# Altium PCB FAT52.PCBDOC
Units mm, origin at the board's own origin, x right, y up, seen from the top; angles counter-clockwise.
Board outline 117.3 x 188.7 mm, 2 copper layers (Top Layer, Bottom Layer); 26 components, 107 nets, 137 pads, 60 vias.
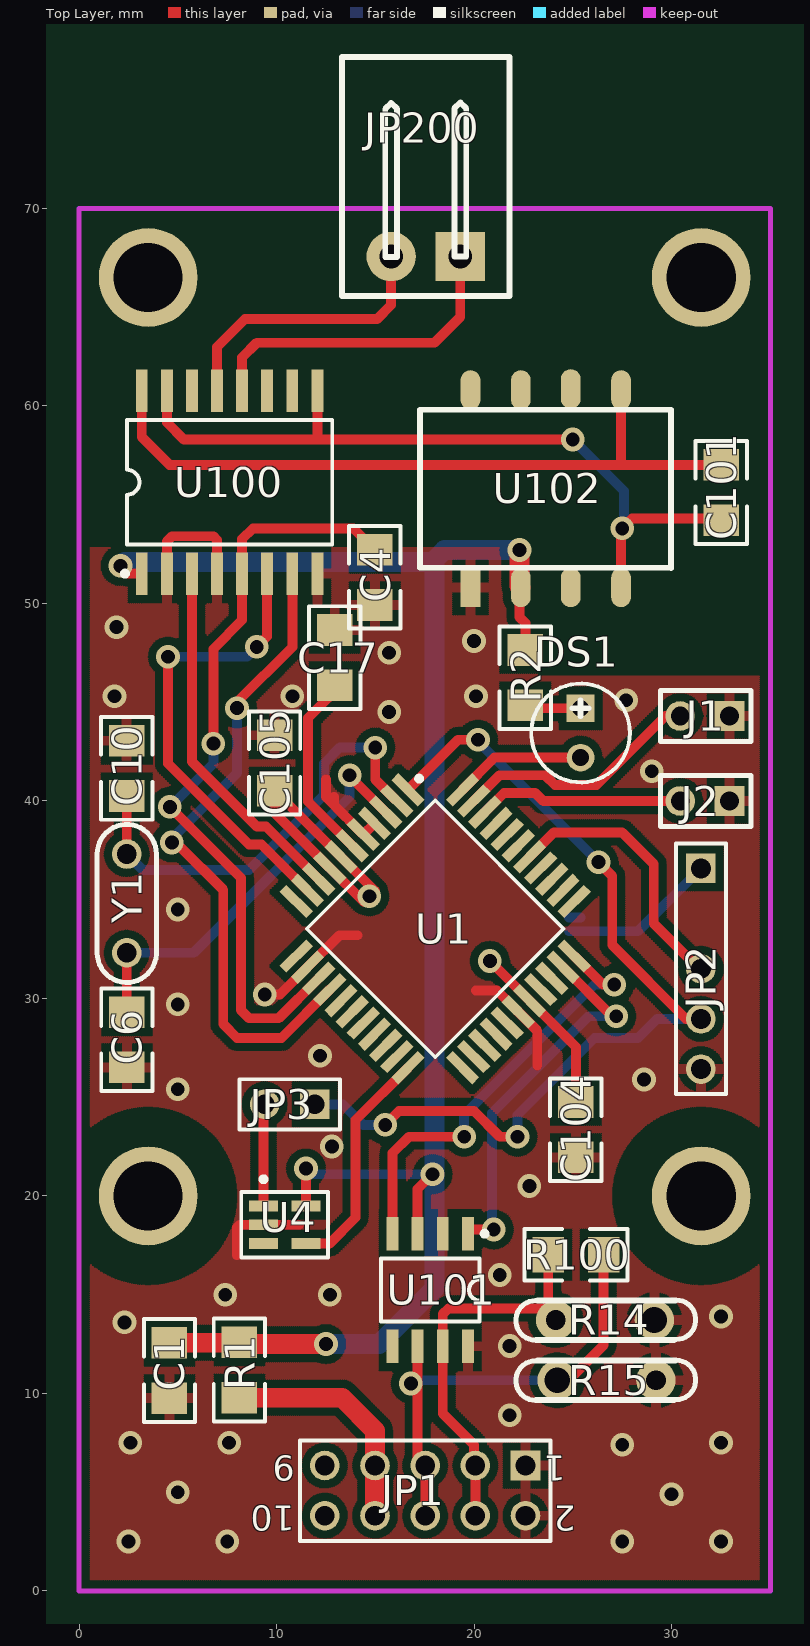
[diagram p0: Top Layer view]
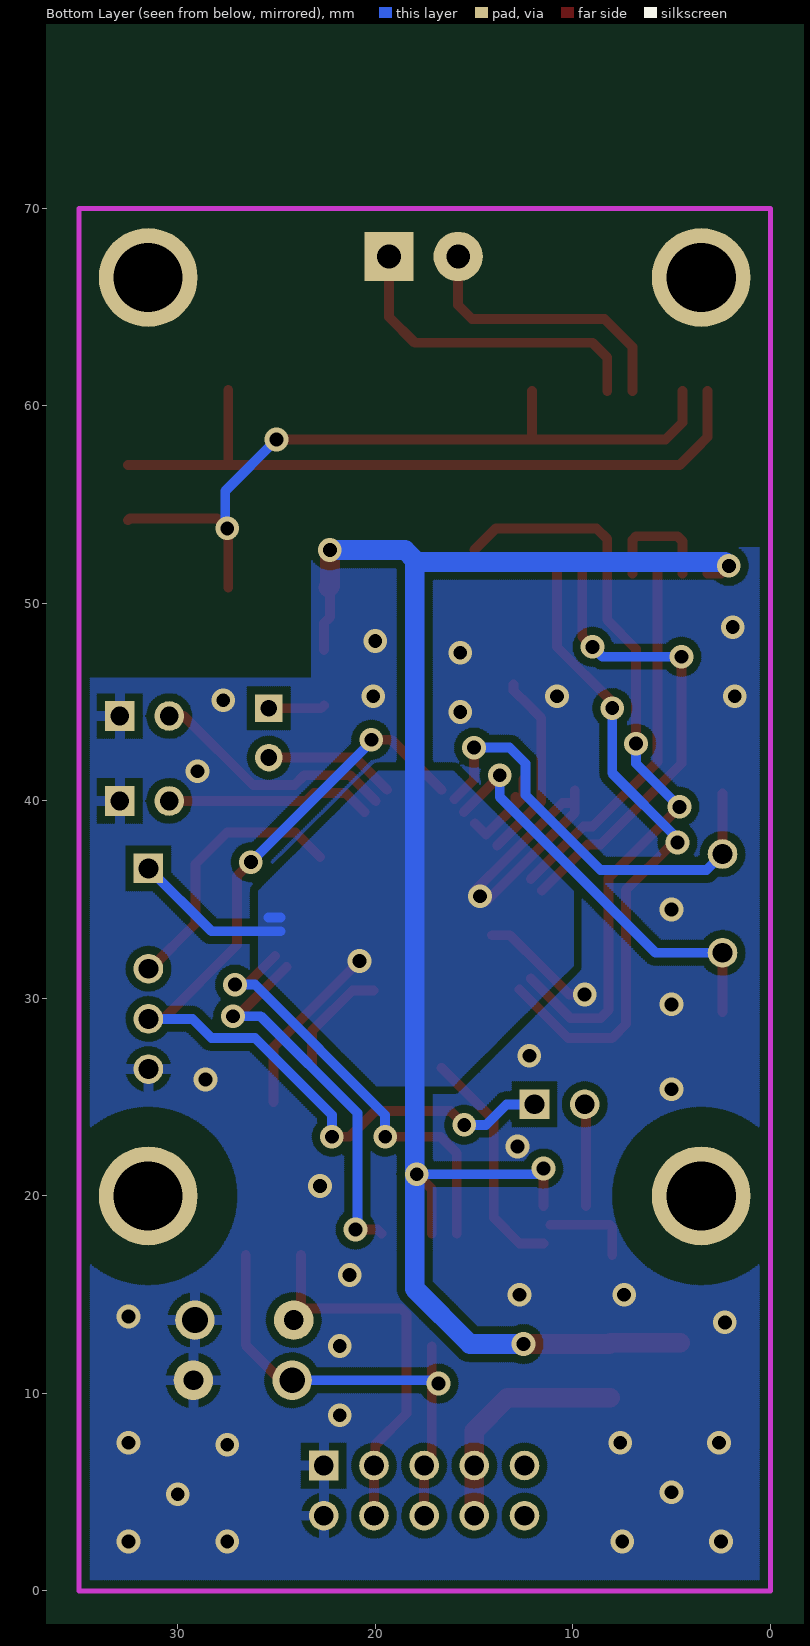
[diagram p1: Bottom Layer view, seen from below]

## Layer stack, top to bottom
Top Layer: signal copper 0.0356
Dielectric: dielectric 0.32, FR-4, Dk 4.8
Bottom Layer: signal copper 0.0356

## Board outline
-28.6,-56.4 88.7,-56.4 88.7,132.3 -24.6,132.3 -24.6,-56.4

## Design rules (kind name [scope] priority, off if disabled: settings)
Clearance Clearance_4 [InPoly vs HasPad('Free-0')] p1: gap=2
Clearance Clearance_2 [All vs InPoly] p2: gap=0.4
Clearance Clearance_1 [InComponent(U1)] p3: gap=0.25
Clearance [All] p4: gap=0.2
ComponentClearance [All] p1: gap=0.254 collisioncheckmode=0
HoleSize [All] p1: absolutevalues=TRUE maxlimit=5 minlimit=0.025 maxpercent=80.000 minpercent=20.000
MinimumAnnularRing [All] p1: minimumring=0.25
PolygonConnect [All] p1: connectstyle=Relief reliefconductorwidth=0.5 reliefentries=4 polygonreliefangle="90 Angle"
RoomDefinition cpu [InComponentClass('cpu')] p1: confinementstyle=ConfineIn formatcopy=TRUE outline -38.3,-84.7 12.5,-84.7 12.5,-59.3 -38.3,-59.3
RoutingLayers [All] p1: top layer=Horizontal bottom layer=Vertical
RoutingVias [All] p1: holewidth=0.7 width=1.2 viastyle="Through Hole" minholewidth=0.6 minwidth=1.1 maxholewidth=0.7 maxwidth=1.2
SolderMaskExpansion [All] p1: expansion=0.102
TestPointUsage [All] p1: valid=0 allowmultiple=FALSE
Testpoint [All] p1: side=15 testpointundercomponent=TRUE minsize=1.016 maxsize=2.54 preferedsize=1.524 minholesize=0 maxholesize=1.016 preferedholesize=0.813 testpointgrid=0.025 style=1023 order=1234567890
Width [All] p1: maxlimit=5 minlimit=0.1 preferedwidth=0.254 toplayer_prefwidth=0.5 bottomlayer_prefwidth=0.5 minimp=50.000000 maximp=50.000000 favimp=50.000000
15 further rules are at their usual default settings.

## Components (designator, comment, footprint, x,y, rotation, side; value= is the part's Value field where it differs from the comment)
C1 "1.0" _1206 4.572,11.176 r90 top
C4 "1n0" _1206 14.986,51.308 r270 top
C6 "10" _1206 2.418,27.92 r90 top
C10 "10" _1206 2.418,41.636 r270 top
C17 "1.0" _1206 12.954,47.244 r270 top
C101 "1.0" _1206 32.512,55.626 r90 top
C104 "1.0" _1206 25.146,23.368 r90 top
C105 "1.0" _1206 9.906,41.91 r270 top
DS1 "LED0" el3 25.4,44.704 r270 top
J1 "PLS2" jmp 32.942,44.287 r180 top
J2 "PLS2" jmp 32.942,39.987 r180 top
JP1 "SCM-10R" HDR2X5 22.606,6.35 r180 top (schematic designator JP?)
JP2 "PLS2" HDR1X5_uart 31.496,36.576 r270 top
JP3 "PLS2" HDR1X2 11.938,24.638 r180 top
JP200 "15EDGR-3.5-2P" 2EDGR-3.5-2P 19.304,67.564 r180 top
R1 "10R" _1206 8.128,11.176 r270 top
R2 "1K0" _1206 22.606,46.228 r270 top
R14 "JVR07N" JVR07N 24.13,13.716 r0 top
R15 "JVR07N" JVR07N 29.21,10.668 r180 top
R100 "K10" _1206 25.146,17.018 r180 top
U1 "STM8S208S6" QFP10X10-G44/G10N 18.034,33.528 r315 top
U4 "TPS3823-50" SO-G5/P.95 10.414,18.542 r270 top
U100 "ADM2483" SO-G16/D10.4 7.62,56.134 r0 top
U101 "TJA1050" SO-G8/D5 17.78,15.24 r180 top
U102 "SBT01L-05" SBT01L 19.812,50.8 r0 top
Y1 "10MGz" QWARZ1 2.418,37.318 r270 top

## Footprints (in the part's own frame and the unit in brackets; to place one, negate y for a bottom-side part, rotate by r counter-clockwise, add the part's x,y. Pads: shape width x height; smd on the part's side, far side on the other; paste and mask are expansions set on the pad)
2EDGR-3.5-2P [mm]
  rect 2.5x2.5 hole 1.2: 1(0,0)
  round 2.5 hole 1.2: 2(3.5,0)
  silkscreen extent -2.5,-10.1 6,2
_1206 [mm]
  rect 1.6x1.8 smd: 1(-1.412,-0.007) 2(1.388,-0.007)
  silkscreen extent -2.61,-1.31 2.59,1.29
el3 [mm]
  rect 1.4x1.4 hole 0.85: 1(0.011,-0.008)
  round 1.4 hole 0.85: 2(2.511,-0.008)
  silkscreen extent -1.24,-2.5 3.76,2.49
HDR1X2 [mm]
  rect 1.5x1.5 hole 1: 1(0,0)
  round 1.5 hole 1: 2(2.54,0)
  silkscreen extent -1.27,-1.27 3.81,1.27
HDR1X5_uart [mm]
  rect 1.5x1.5 hole 1: 1(-0.008,-0.009)
  round 1.5 hole 1: 3(5.072,-0.009) 4(7.612,-0.009) 5(10.152,-0.009)
  silkscreen extent -1.28,-1.28 11.42,1.26
HDR2X5 [mm]
  rect 1.5x1.5 hole 1: 1(0,0)
  round 1.5 hole 1: 2(0,2.54) 3(2.54,0) 4(2.54,2.54) 5(5.08,0) 6(5.08,2.54) 7(7.62,0) 8(7.62,2.54) 9(10.16,0) 10(10.16,2.54)
  silkscreen extent -1.27,-1.27 11.43,3.81
jmp [mm]
  rect 1.5x1.5 hole 0.95: 1(0.008,-0.012)
  round 1.5 hole 0.95: 2(2.508,-0.012)
  silkscreen extent -1.09,-1.31 3.51,1.29
JVR07N [mm]
  round 2 hole 1: 1(0,0)
  round 2 hole 1.3: 2(5,0)
  silkscreen extent -2.01,-1.02 7.09,1.02
QFP10X10-G44/G10N [mm]
  rect 1.9x0.5 smd: 1(-5.95,4) 2(-5.95,3.2) 3(-5.95,2.4) 4(-5.95,1.6) 5(-5.95,0.8) 6(-5.95,0) 7(-5.95,-0.8) 8(-5.95,-1.6) 9(-5.95,-2.4) 10(-5.95,-3.2) 11(-5.95,-4) 23(5.95,-4) 24(5.95,-3.2) 25(5.95,-2.4) 26(5.95,-1.6) 27(5.95,-0.8) 28(5.95,0) 29(5.95,0.8) 30(5.95,1.6) 31(5.95,2.4) 32(5.95,3.2) 33(5.95,4)
  rect 0.5x1.9 smd: 12(-4,-5.95) 13(-3.2,-5.95) 14(-2.4,-5.95) 15(-1.6,-5.95) 16(-0.8,-5.95) 17(0,-5.95) 18(0.8,-5.95) 19(1.6,-5.95) 20(2.4,-5.95) 21(3.2,-5.95) 22(4,-5.95) 34(4,5.95) 35(3.2,5.95) 36(2.4,5.95) 37(1.6,5.95) 38(0.8,5.95) 39(0,5.95) 40(-0.8,5.95) 41(-1.6,5.95) 42(-2.4,5.95) 43(-3.2,5.95) 44(-4,5.95)
  silkscreen extent -6.07,-4.6 4.6,4.92
QWARZ1 [mm]
  round 1.5 hole 1: 1(0.008,0) 2(5.008,0)
  silkscreen extent -1.49,-1.5 6.51,1.5
SBT01L [mm]
  rect 1x2 smd: 1(0.007,0.007)
  oval 1x2 smd: 2(2.557,0.007) 3(5.082,0.007) 4(7.632,0.007) 5(7.632,10.007) 6(5.082,10.057) 7(2.557,10.007) 8(0.007,10.007)
  silkscreen extent -2.54,0.98 10.16,9.01
SO-G5/P.95 [mm]
  rect 0.55x1.45 smd: 1(-0.95,-1.075) 2(0,-1.075) 3(0.95,-1.075) 4(0.95,1.075) 5(-0.95,1.075)
  silkscreen extent -2.42,-2.2 1.65,2.2
SO-G8/D5 [mm]
  rect 0.6x1.7 smd: 1(-1.905,-2.85) 2(-0.635,-2.85) 3(0.635,-2.85) 4(1.905,-2.85) 5(1.905,2.85) 6(0.635,2.85) 7(-0.635,2.85) 8(-1.905,2.85)
  silkscreen extent -2.88,-2.97 2.5,1.6
SO-G16/D10.4 [mm]
  rect 0.6x2.15 smd: 1(-4.445,-4.625) 2(-3.175,-4.625) 3(-1.905,-4.625) 4(-0.635,-4.625) 5(0.635,-4.625) 6(1.905,-4.625) 7(3.175,-4.625) 8(4.445,-4.625) 9(4.445,4.625) 10(3.175,4.625) 11(1.905,4.625) 12(0.635,4.625) 13(-0.635,4.625) 14(-1.905,4.625) 15(-3.175,4.625) 16(-4.445,4.625)
  silkscreen extent -5.42,-4.75 5.2,3.15

## Part data
C1 C104 C105: library part Cap, "Capacitor"
C4 C6 C10 C17 C101: library part "Cap Semi", "Capacitor (Semiconductor SIM Model)"
DS1: "Typical INFRARED GaAs LED"
J1 J2: library part JMP, "Switch"
JP1: library part MHDR1X10, "Header, 10-Pin"
JP2 JP3: library part "Header 2", "Header, 2-Pin"
JP200: library part MHDR1X2, "Header, 2-Pin"
R1 R2 R100: library part Res2, "Resistor"
R14 R15: library part "Res Varistor", "Varistor (Voltage-Sensitive Resistor)"
U1: library part LPC2368FBD100
U4: library part TPS3823, "Reset IC"
U102: library part SBT01L
Y1: library part XTAL, "Crystal Oscillator"

## Free pads (board coordinates)
  round 5 hole 3.5: 0(3.5,20) 0(3.5,66.5) 0(31.5,20) 1(31.5,66.5)

## Via types
v1: diameter 1.2, hole 0.7, Top Layer to Bottom Layer, 60 vias

## Nets (pads, with @x,y where several pads share a name; then routed paths per layer and width w, separated by ;. In a path a pad name is that pad's centre, name@x,y a point inside that pad or via, vN(x,y) a via of type N, cw(c..) or ccw(c..) an arc to the next point about the centre after c; other vN are vias at no path point)
+5V: C1.2 C104.2 C105.2 JP2.1 R1.1 R2.1 U1.7 U1.8 U1.29 U4.5 U100.1 U101.3 U102.2 | length 124.8
  Top Layer w0.5: v1(2.1,51.9) 2.491,51.509 U100.1 ; C105.2@9.899,39.9 C105.2 9.899,39.4 U1.8 14.399,34.9 14.469,34.9 v1@14.705,35.136 ; C105.2@10,39.9 10.531,39.9 U1.7 14.965,35.465 15,35.431 14.735,35.165 14.707,35.165 v1(14.7,35.172) v1@14.721,35.151 ; U4.5 v1(11.489,21.389) ; U101.3 17.145,20.345 v1(17.9,21.1) ; v1(20.8,31.9) 20.8,31.893 U1.29 25.153,27.541 C104.2 ; U102.2@22.3,50.877 22.3,49.3 22.599,49.001 R2.1
  Top Layer w1: C1.2 8.097,12.564 8.16,12.5 v1(12.5,12.5) ; v1(22.3,52.7) 22.3,50.877 U102.2
  Bottom Layer w0.5: v1(11.489,21.389) 11.778,21.1 v1(17.9,21.1) ; 24.8,33.4 28.303,33.4 JP2.1 ; 24.8,34.1 25.4,34.1
  Bottom Layer w1: v1(2.1,51.9) 2.3,52.1 18,52.1 ; v1(12.5,12.5) 15.2,12.5 18,15.3 18,44.5 18,49.2 ; 18,48.8 18,52.2 18.5,52.7 v1(22.3,52.7) 21.5,52.7
A: JP200.1 U100.12 | length 16.7
  Top Layer w0.5: U100.12 8.255,62.455 9,63.2 18,63.2 19.304,64.504 JP200.1
A4: 
A5: 
A6: 
AREF: 
AVCC: 
B: JP200.2 U100.13 | length 14.4
  Top Layer w0.5: U100.13 6.985,62.985 8.4,64.4 15.1,64.4 15.804,65.104 JP200.2
BO: 
C: 
CANH: JP1.3 JP1.4 R14.1 R100.2 U101.7 | length 20.4
  Top Layer w0.5: JP1.4 20.066,6.334 20,6.4 20,7.4 18.415,8.985 U101.7 18.415,14.015 18.7,14.3 23.546,14.3 R14.1 23.758,14.088 R100.2
CANL: JP1.5 JP1.6 R15.2 R100.1 U101.6 | length 24.2
  Top Layer w0.5: v1(16.8,10.5) v1@17.145,10.5 ; U101.6 17.145,6.731 JP1.5 JP1.6 ; R15.2 24.785,10.668 26.558,12.442 R100.1
  Bottom Layer w0.5: v1(16.8,10.5) 16.968,10.668 R15.2
D0: 
D1: 
D2: 
D3: 
D4: 
D5: 
GND: C1.1 C4.2 C6.1 C10.1 C17.1 C104.1 C105.1 J1.1 J2.1 JP1.1 JP1.2 JP2.5 R14.2 R15.1 U1.4 U1.5 U1.13 U1.28 U4.2 U100.2 U100.4 U100.8 U101.2 U101.8 U102.1 | length 29.8
  Top Layer w0.5: 4.445,52.945 U100.2 4.445,53.145 4.7,53.4 5.2,53.4 ; 4.9,53.4 6.8,53.4 6.985,53.215 U100.4 ; 8,17 8,18.4 8.142,18.542 U4.2 11.142,18.542 ; v1(9.4,30.2) 10.181,30.2 U1.13 13.181,33.2 14.1,33.2 ; 12.5,41.1 12.5,40.193 13.518,39.175 ; 12.9,40.2 12.9,39.793 U1.5 U1.4 ; 20.1,30.4 21.162,30.4 U1.28 ; U1.28@22.163,29.399 23.2,28.362 23.2,26.6
  other v1: 2.5,2.5 7.5,2.5 27.5,2.5 32.5,2.5 30,4.9 5,5 27.5,7.4 2.6,7.5 7.6,7.5 32.5,7.5 21.8,8.9 21.8,12.4 2.3,13.6 32.5,13.9 7.4,15 12.7,15 21.3,16 22.8,20.5 12.8,22.5 5,25.4 28.6,25.9 12.2,27.1 5,29.7 5,34.5 29,41.5 15.7,44.5 27.7,45.1 1.8,45.3 10.8,45.3 20.1,45.3 15.7,47.5 20,48.1 1.9,48.8
IN1: 
IN2: 
IN3: 
KL1C: 
KL2C: 
MISO: 
MOSI: 
NetC9_1: 
NetC17_2: C17.2 U1.6 | length 10.5
  Top Layer w0.5: 11.9,39.662 U1.6 ; 11.9,44.5 12.2,44.8 ; 12.18,39.382 11.6,39.962 11.6,44.2 12.2,44.8 ; C17.2@13,45.9 13,45.6 12.2,44.8
NetC101_1: C101.1 U100.9 U100.15 U102.4 | length 38.9
  Top Layer w0.5: U100.15 4.445,59.155 5.3,58.3 v1(25,58.3) ; 12.065,58.365 U100.9 ; U102.4 27.444,53.744 v1(27.5,53.8) 28,54.3 32.432,54.3 C101.1
  Bottom Layer w0.5: v1(25,58.3) 27.6,55.7 27.6,53.8 v1(27.5,53.8)
NetC101_2: C101.2 U100.16 U102.5 | length 70.8
  Top Layer w0.5: 3.175,58.725 U100.16 3.175,58.425 4.5,57.1 ; 3.5,58.1 4.586,57.014 ; 3.947,57.653 4.586,57.014 ; 8.8,57.014 10.914,57.014 ; 27.4,57.014 27.444,57.058 27.444,58.8 ; 27.444,58.356 U102.5 ; C101.2@32.4,57.014 4.586,57.014 ; C101.2 4.586,57.014
NetC200_2: 
NetC201_2: 
NetC203_2: 
NetC207_2: 
NetD1_2: 
NetD2_1: 
NetD2_2: 
NetD4_2: 
NetD200_1: 
NetD201_1: 
NetD202_1: 
NetDS1_1: DS1.1 R2.2 | length 2.9
  Top Layer w0.5: R2.2 22.747,44.693 DS1.1
NetDS2_1: 
NetDS3_1: 
NetDS4_1: 
NetF202_1: 
NetF202_2: 
NetJ1_2: J1.2 U1.43 | length 12.7
  Top Layer w0.5: U1.43 21.281,41.3 23.6,41.3 24.1,40.8 26.2,40.8 29.699,44.299 J1.2
NetJ1_3: 
NetJ1_8: 
NetJ2_2: J2.2 U1.42 | length 10.5
  Top Layer w0.5: U1.42 21.512,40.4 23.1,40.4 23.501,39.999 J2.2
NetJP1_5: 
NetJP1_6: 
NetJP1_7: JP1.7 JP1.8 R1.2 | length 11.9
  Top Layer w1: R1.2 13.312,9.788 14.986,8.114 JP1.8
NetJP2_1: 
NetJP2_2: 
NetJP3_2: JP3.2 U4.1 | length 5.2
  Top Layer w0.5: U4.1 9.339,21.649 9.339,24.579 JP3.2
NetJP4_1: 
NetJP200_1: 
NetJP200_2: 
NetJP201_1: 
NetJP201_2: 
NetJP?_9: 
NetJP?_10: 
NetQ1_1: 
NetQ1_2: 
NetQ1_4: 
NetR8_2: 
NetR16_1: 
NetR17_1: 
NetT1_7: 
NetT1_9: 
NetU1_7: 
NetU1_8: 
NetU1_12: 
NetU1_13: 
NetU1_14: 
NetU1_40: U1.40
P0_2: 
P0_3: 
P0_19: 
P0_23: 
P0_24: 
P0_25: 
P1_20: 
P1_21: 
P1_28: 
P1_29: 
P2_0: 
P2_10: 
PA1: C10.2 U1.2 Y1.1 | length 22.5
  Top Layer w0.5: Y1.1 C10.2@2.418,40.382 ; v1(15,42.7) 15,41.087 U1.2@15.987,40.1
  Bottom Layer w0.5: Y1.1 3.228,36.5 8.6,36.5 12.4,40.3 12.4,41.9 13.2,42.7 v1(15,42.7)
PA2: C6.2 U1.3 Y1.2 | length 21.3
  Top Layer w0.5: Y1.2 2.418,29.314 C6.2 ; v1(13.7,41.3) 13.7,41.256 U1.3
  Bottom Layer w0.5: Y1.2 5.81,32.31 13.7,40.2 v1(13.7,41.3)
PA4: U1.9 U100.3 | length 18.4
  Top Layer w0.5: U100.3 5.715,42.453 5.715,41.985 9,38.7 9.468,38.7 U1.9
PA5: U1.10 U100.6 | length 23.8
  Top Layer w0.5: v1(4.5,47.3) 4.5,41.9 8.6,37.8 9.236,37.8 U1.10 ; v1(9,47.8) 9.525,48.325 U100.6
  Bottom Layer w0.5: v1(4.5,47.3) 8.5,47.3 v1(9,47.8)
PB6: U1.15 U100.7 | length 33.2
  Top Layer w0.5: v1(4.7,37.9) 4.8,37.8 5,37.8 7.3,35.5 7.3,28.7 8,28 10.243,28 U1.15 ; v1(8,44.7) 8,45 10.8,47.8 10.8,49.1 U100.7@10.8,51.504 ; U100.7@10.8,51.504 U100.7 U100.7@10.8,51.504
  Bottom Layer w0.5: v1(4.7,37.9) 4.7,38.1 8,41.4 v1(8,44.7)
PB7: C4.1 U1.14 U100.5 | length 39.2
  Top Layer w0.5: v1(4.6,39.7) 8.2,36.1 8.2,29.4 8.6,29 10.112,29 U1.14 ; v1(6.8,42.9) 6.8,47.7 8.255,49.155 U100.5 8.255,53.255 8.8,53.8 13.9,53.8 C4.1
  Bottom Layer w0.5: v1(4.6,39.7) 6.8,41.9 v1(6.8,42.9)
PC7: U1.31
PD1: JP2.3 U1.38 | length 13.8
  Top Layer w0.5: U1.38 24.037,38.4 27.5,38.4 29.1,36.8 29.1,33.8 31.396,31.504 JP2.3
PD7: DS1.2 U1.44 | length 6.7
  Top Layer w0.5: U1.44 21.042,42.193 DS1.2
PE6: U1.22 U4.4 | length 11.7
  Top Layer w0.5: U4.4 12.692,17.592 14,18.9 14,23.837 U1.22
PG0: U1.32 U101.1 | length 19.4
  Top Layer w0.5: U101.1 19.895,18.3 v1(21,18.3) ; U1.32 26.987,29.1 v1(27.2,29.1)
  Bottom Layer w0.5: v1(21,18.3) 20.9,18.4 20.9,24.2 25.8,29.1 v1(27.2,29.1)
PG1: U1.33 U101.4 | length 22.1
  Top Layer w0.5: U101.4 15.875,22.175 16.7,23 v1(19.5,23) ; U1.33 26.519,30.7 v1(27.1,30.7)
  Bottom Layer w0.5: v1(19.5,23) 19.5,24.1 26.1,30.7 v1(27.1,30.7)
RES: 
RST: JP2.4 JP3.1 U1.1 | length 47.8
  Top Layer w0.5: v1(15.5,23.6) 16.2,24.3 20,24.3 21.3,23 v1(22.2,23) ; U1.1 19.191,43.1 v1(20.2,43.1) ; v1(26.3,36.9) 27,36.2 27,32.7 30.736,28.964 JP2.4
  Bottom Layer w0.5: JP3.1 13.362,24.638 14.4,23.6 v1(15.5,23.6) ; v1(20.2,43.1) 20.2,43 v1(26.3,36.9) ; v1(22.2,23) 22.2,24.1 26.1,28 28.3,28 29.264,28.964 JP2.4
SCK: 
U3U: 
VENT: 
pads on no net: JP1.9 JP1.10 U1.11 U1.12 U1.16 U1.17 U1.18 U1.19 U1.20 U1.21 U1.23 U1.24 U1.25 U1.26 U1.27 U1.30 U1.34 U1.35 U1.36 U1.37 U1.39 U1.41 U4.3 U100.10 U100.11 U100.14 U101.5 U102.3 U102.6 U102.7 U102.8

## Polygon pours and split planes (outlines as drawn)
GND on Top Layer (hatched 90Degree grid 0.1 track 0.1, remove dead copper): -1.1,52.8 23.2,52.8 23.2,46.3 36.1,46.3 36.1,-1.9 -3,-1.9 -3,52.8
+5V on Bottom Layer (hatched 90Degree grid 0.1 track 0.3, remove dead copper): 10.1,35.4 16.1,41.4 19.8,41.4 25.8,35.4 25.8,31.6 19.9,25.7 16.1,25.7 10.1,31.7
GND on Bottom Layer (hatched 90Degree grid 0.1 track 0.1, remove dead copper): -0.8,52.8 23.2,52.8 23.2,46.2 36,46.2 36,-1.1 -1.1,-1.1 -1.1,52.8

## Keep-outs
Keep-Out Layer:
  lines w0.25: 0,0 35,0 35,70 0,70 0,0

## Dimensions
0,0 to 35,0 on Mechanical 1
0,0 to 0,70 on Mechanical 1

## Text inside footprints (layer, text, board x,y; h text height)
JP1: Top Overlay "10" at 10.922,4.318 h1.27 r180; Top Overlay "9" at 10.922,6.858 h1.27 r180; Top Overlay "1" at 24.638,6.858 h1.27 r180; Top Overlay "2" at 25.146,4.318 h1.27 r180